# Altium PCB interface.PcbDoc
Units mil, origin at the board's own origin, x right, y up, seen from the top; angles counter-clockwise.
Board outline 1450 x 610 mil, 2 copper layers (Top Layer, Bottom Layer); 7 components, 5 nets, 14 pads, 0 vias.
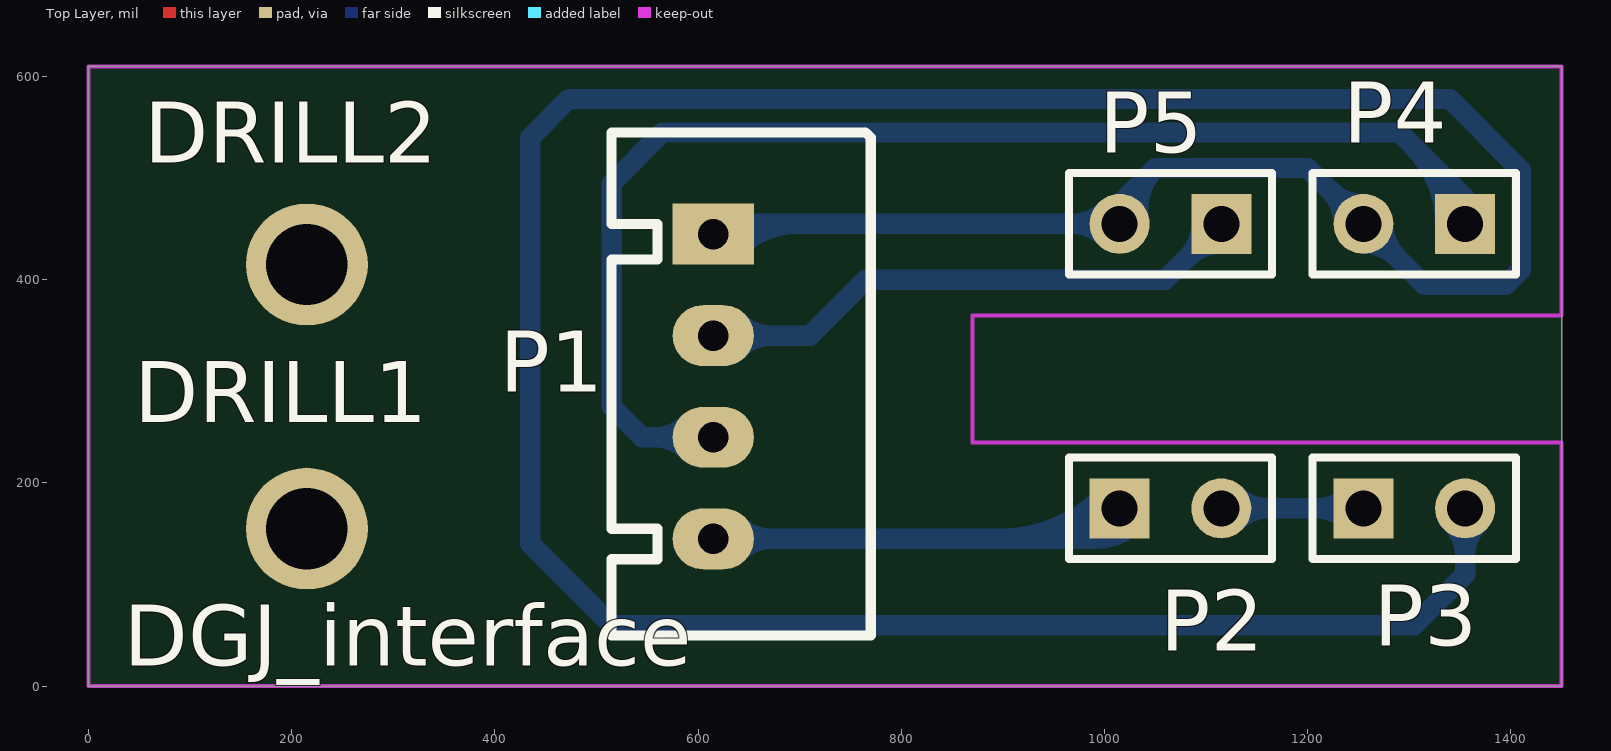
[diagram p0: Top Layer view]
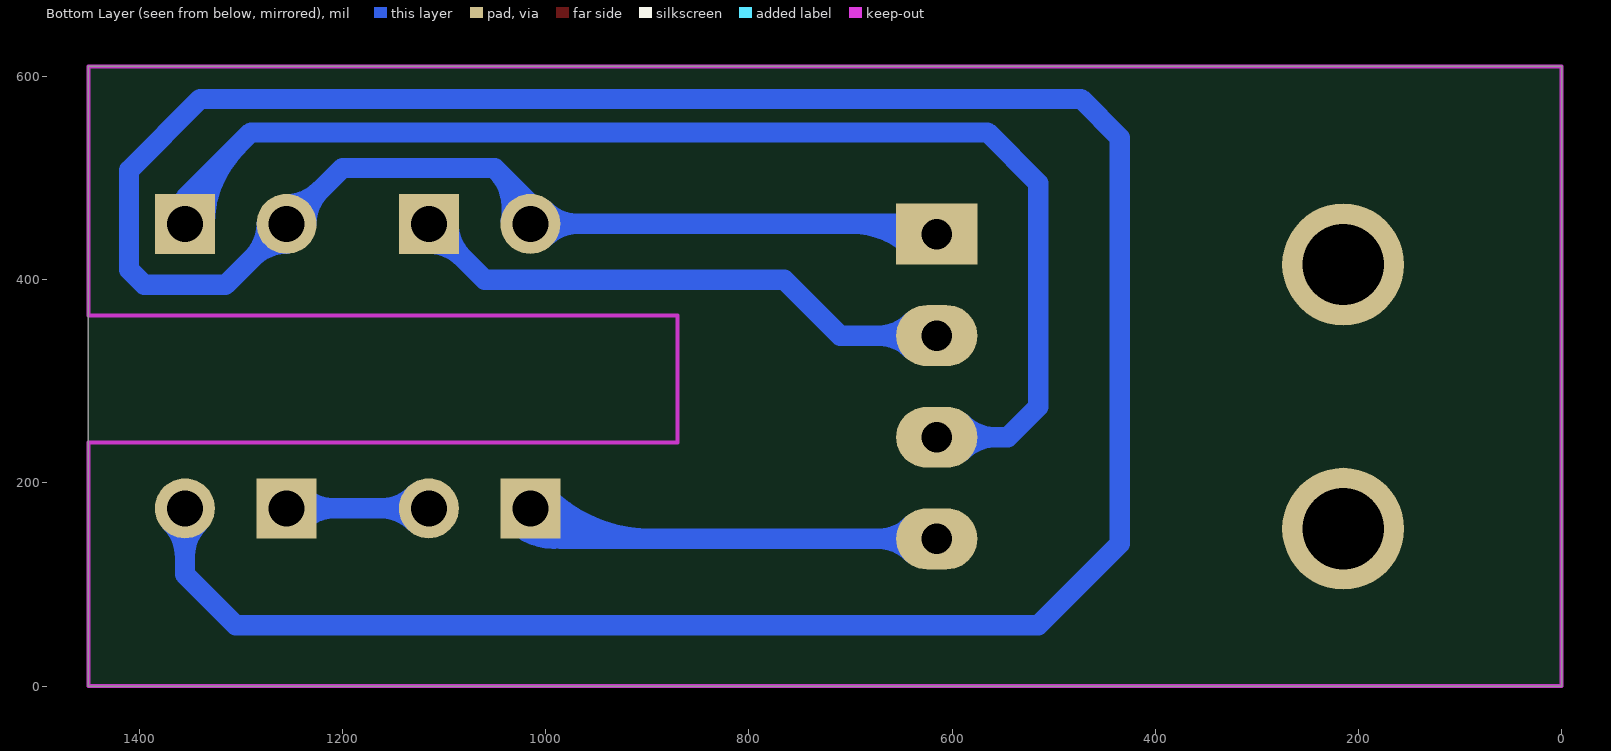
[diagram p1: Bottom Layer view, seen from below]

## Layer stack, top to bottom
Top Layer: signal copper 1.4
Dielectric: dielectric 12.6, FR-4, Dk 4.8
Bottom Layer: signal copper 1.4

## Board outline
0,610 0,0 1450,0 1450,610

## Design rules (kind name [scope] priority, off if disabled: settings)
Clearance [All] p1: gap=10
PolygonConnect [All] p1: connectstyle=Relief reliefconductorwidth=10 reliefentries=4 polygonreliefangle="90 Angle"
RoutingVias [All] p1: holewidth=28 width=50 viastyle="Through Hole" minholewidth=28 minwidth=50 maxholewidth=28 maxwidth=50
SilkscreenOverComponentPads [All] p1: minsilkscreentomaskgap=10
SolderMaskExpansion [All] p1: expansion=4
Width [All] p1: maxlimit=20 minlimit=10 preferedwidth=10
27 further rules are at their usual default settings.

## Components (designator, comment, footprint, x,y, rotation, side; value= is the part's Value field where it differs from the comment)
DRILL1 "DRILL" DRILL_2MM 215,155 r90 top
DRILL2 "DRILL" DRILL_2MM 215,415 r90 top
P1 "Header 4X1" HDR4X1 615,295 r270 top
P2 "Header 2" HDR1X2 1015,175 r0 top
P3 "Header 2" HDR1X2 1255,175 r0 top
P4 "Header 2" HDR1X2 1355,455 r180 top
P5 "Header 2" HDR1X2 1115,455 r180 top

## Footprints (in the part's own frame and the unit in brackets; to place one, negate y for a bottom-side part, rotate by r counter-clockwise, add the part's x,y. Pads: shape width x height; smd on the part's side, far side on the other; paste and mask are expansions set on the pad)
DRILL_2MM [mil]
  round 120 hole 80: 1(0,0)
HDR1X2 [mm] "Connector; Header; 2 Position"
  rect 1.5x1.5 hole 0.9: 1(0,0)
  round 1.5 hole 0.9: 2(2.54,0)
  silkscreen extent -1.27,-1.27 3.81,1.27
HDR4X1 [mil]
  rect 60x80 hole 30: 1(-150,0)
  oval 60x80 hole 30: 2(-50,0) 3(50,0) 4(150,0)
  silkscreen extent -250,-100 245,155

## Part data
P1: "Header,4-Pin"
P2 P3 P4 P5: "Header, 2-Pin"

## Nets (pads, with @x,y where several pads share a name; then routed paths per layer and width w, separated by ;. In a path a pad name is that pad's centre, name@x,y a point inside that pad or via, vN(x,y) a via of type N, cw(c..) or ccw(c..) an arc to the next point about the centre after c; other vN are vias at no path point)
GND: P1.1 P3.2 P4.2 P5.2 | length 3860.9
  Bottom Layer w20: P1.1 625,455 P5.2 1015,475 1050,510 ; P1.1@639.14,430.86 cw(c697.43,372.57) 697.43,455 ; P5.2@1001.19,441.19 ccw(c967.86,407.86) 967.86,455 ccw(c967.86,502.14) P5.2@1001.19,468.81 ; P5.2@1034.18,458.65 cw(c1090.62,469.38) 1050,510 ; P4.2@1235.47,455 ccw(c1188.33,455) 1221.66,488.34 ccw(c1255,521.67) P4.2@1255,474.53 ; P4.2@1255,435.47 cw(c1255,388.33) 1288.34,421.66 cw(c1321.67,455) P4.2@1274.53,455 ; P3.2@1341.19,161.19 cw(c1307.86,127.86) 1355,127.86 cw(c1402.14,127.86) P3.2@1368.81,161.19 ; P3.2 1355,110 1305,60 515,60 435,140 435,540 473,578 1340,578 1410,508 1410,410 1395,395 1315,395 P4.2 1200,510 1050,510
LED: P2.2 P3.1 | length 288.1
  Bottom Layer w20: P2.2 P3.1 ; P2.2@1128.81,161.19 cw(c1162.14,127.86) 1162.14,175 cw(c1162.14,222.14) P2.2@1128.81,188.81 ; P3.1@1241.19,161.19 ccw(c1207.86,127.86) 1207.86,175 ccw(c1207.86,222.14) P3.1@1241.19,188.81
NODE1: P1.3 P4.1 | length 1451.8
  Bottom Layer w20: P1.3@590.86,230.86 ccw(c556.72,196.72) 556.72,245 ccw(c556.72,293.28) P1.3@590.86,259.14 ; P1.3 545,245 515,275 515,495 565,545 1290,545 1355,480 P4.1 ; 1303.99,531.01 cw(c1227.97,455) P4.1@1335.47,455 ; 1338.13,496.87 cw(c1296.26,455) P4.1@1355.47,455
NODE2: P1.2 P5.1 | length 695.5
  Bottom Layer w20: P1.2 710,345 765,400 1060,400 P5.1 ; P1.2@639.14,330.86 cw(c673.28,296.72) 673.28,345 cw(c673.28,393.28) P1.2@639.14,359.14 ; P5.1@1095.47,455 cw(c1048.33,455) 1081.66,421.66 cw(c1115,388.33) P5.1@1115,435.47
VCC: P1.4 P2.1 | length 726.9
  Bottom Layer w20: P1.4 985,145 P2.1 ; P1.4@639.14,130.86 cw(c673.28,96.72) 673.28,145 cw(c673.28,193.28) P1.4@639.14,159.14 ; 895.43,145 ccw(c895.43,294.57) P2.1@1001.19,188.81 ; 943.71,145 ccw(c943.71,246.29) P2.1@1015.33,174.67 ; 992,145 ccw(c992,198) P2.1@1029.48,160.52
pads on no net: DRILL1.1 DRILL2.1

## Keep-outs
Keep-Out Layer:
  lines w4: 0,0 0,610 1450,610 1450,365 870,365 870,240 1450,240 1450,0 0,0

## Silkscreen, mask and mechanical layers (free items; w line width, h text height)
Top Overlay:
  text "DGJ_interface" at 35,20 h60
Mechanical 1:
  lines w4: 1450,0 0,0 0,610 1450,610 1450,365 870,365 870,240 1450,240 1450,5